# Altium PCB batteryreversed.PcbDoc
Units mil, origin at the board's own origin, x right, y up, seen from the top; angles counter-clockwise.
Board outline 3775.2 x 3550 mil, 2 copper layers (Top Layer, Bottom Layer), stack 64.572 mil thick; 86 components, 62 nets, 378 pads, 68 vias.
Unrouted connection lines stored in the file: 59.
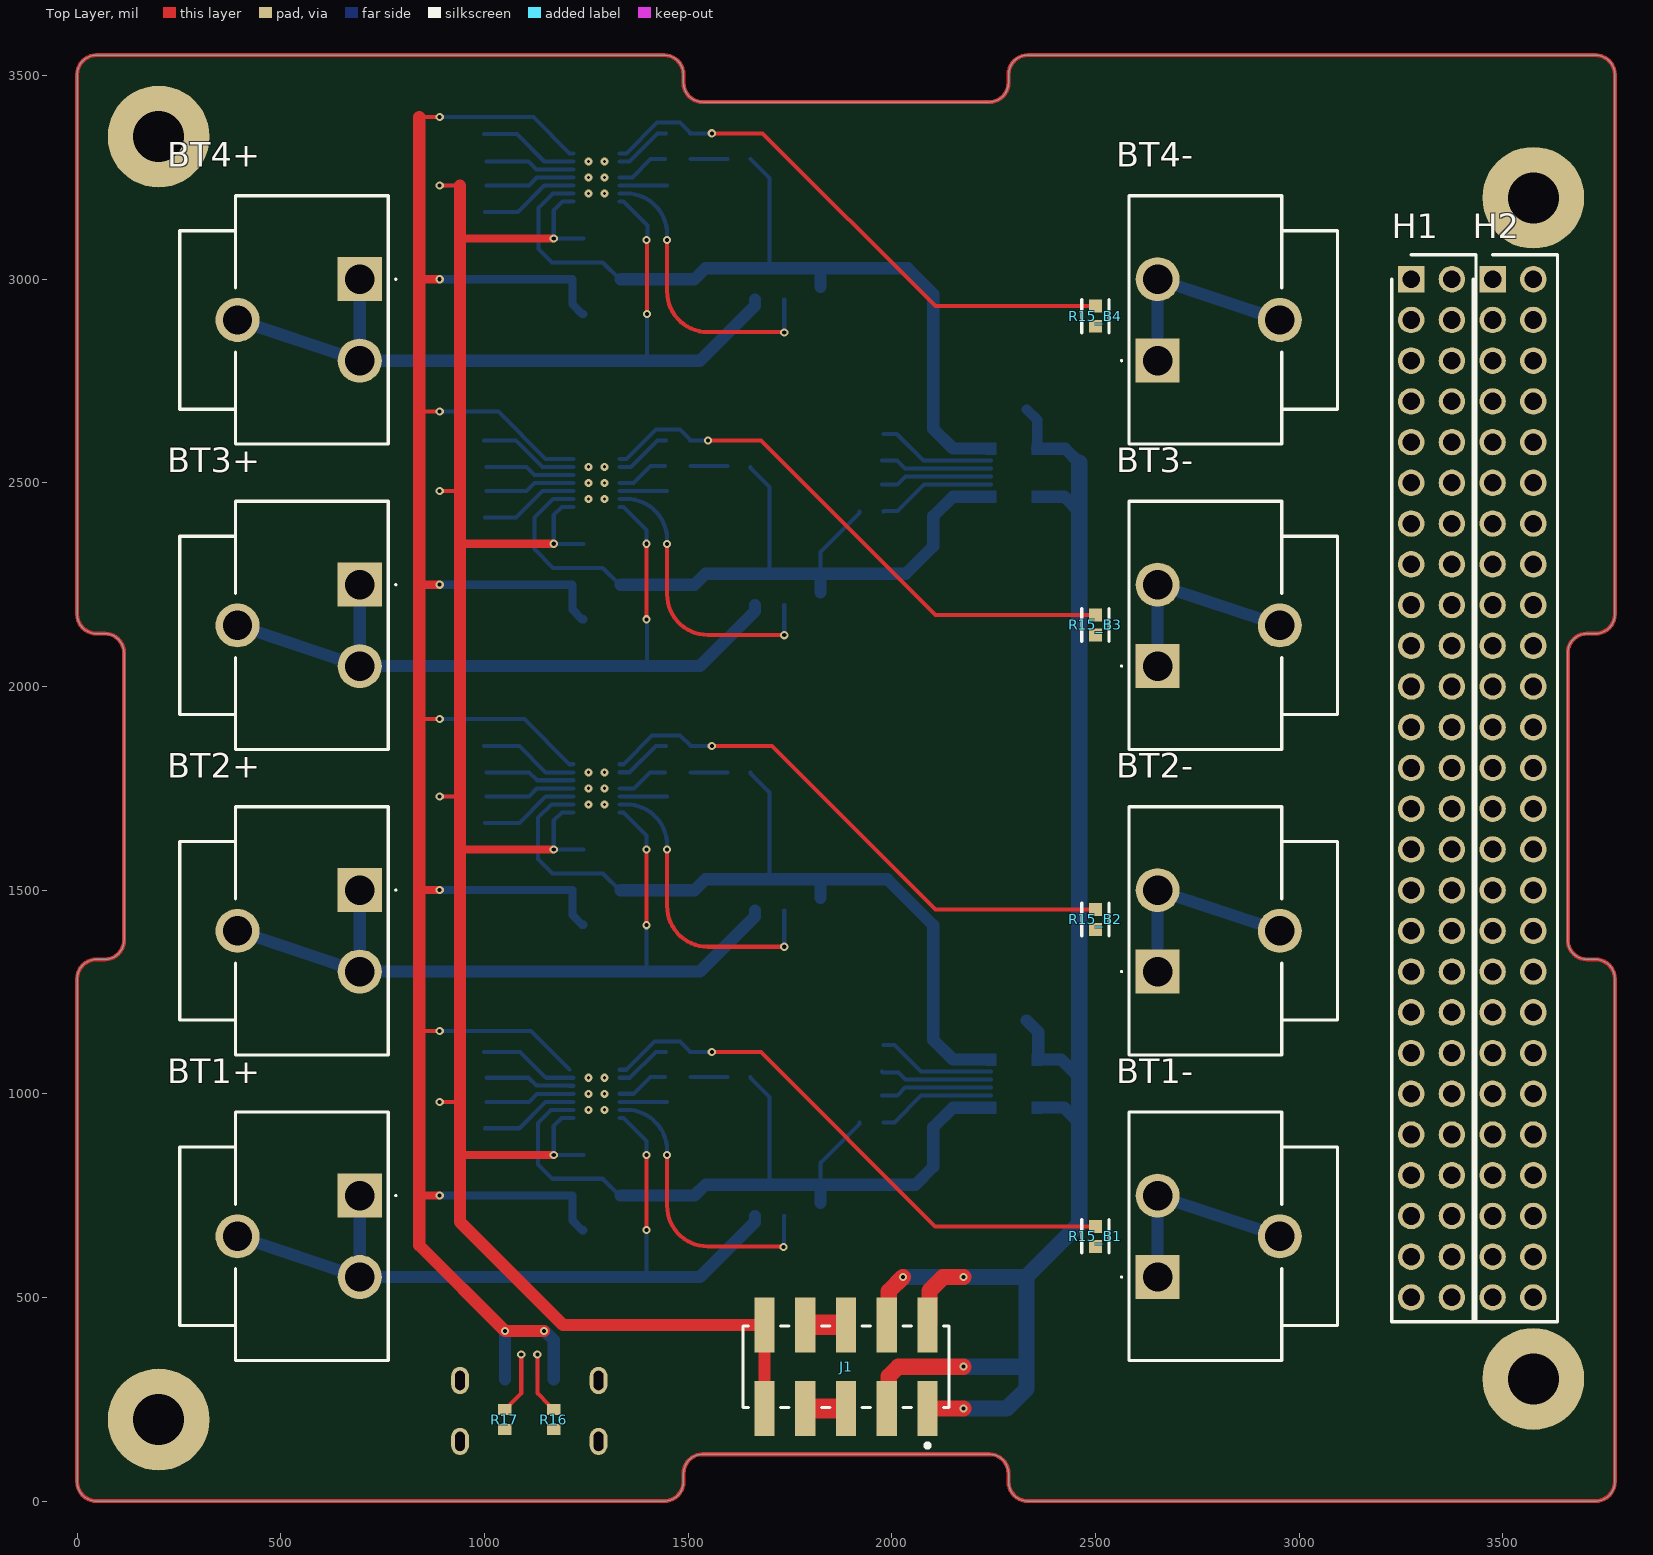
[diagram p0: Top Layer view]
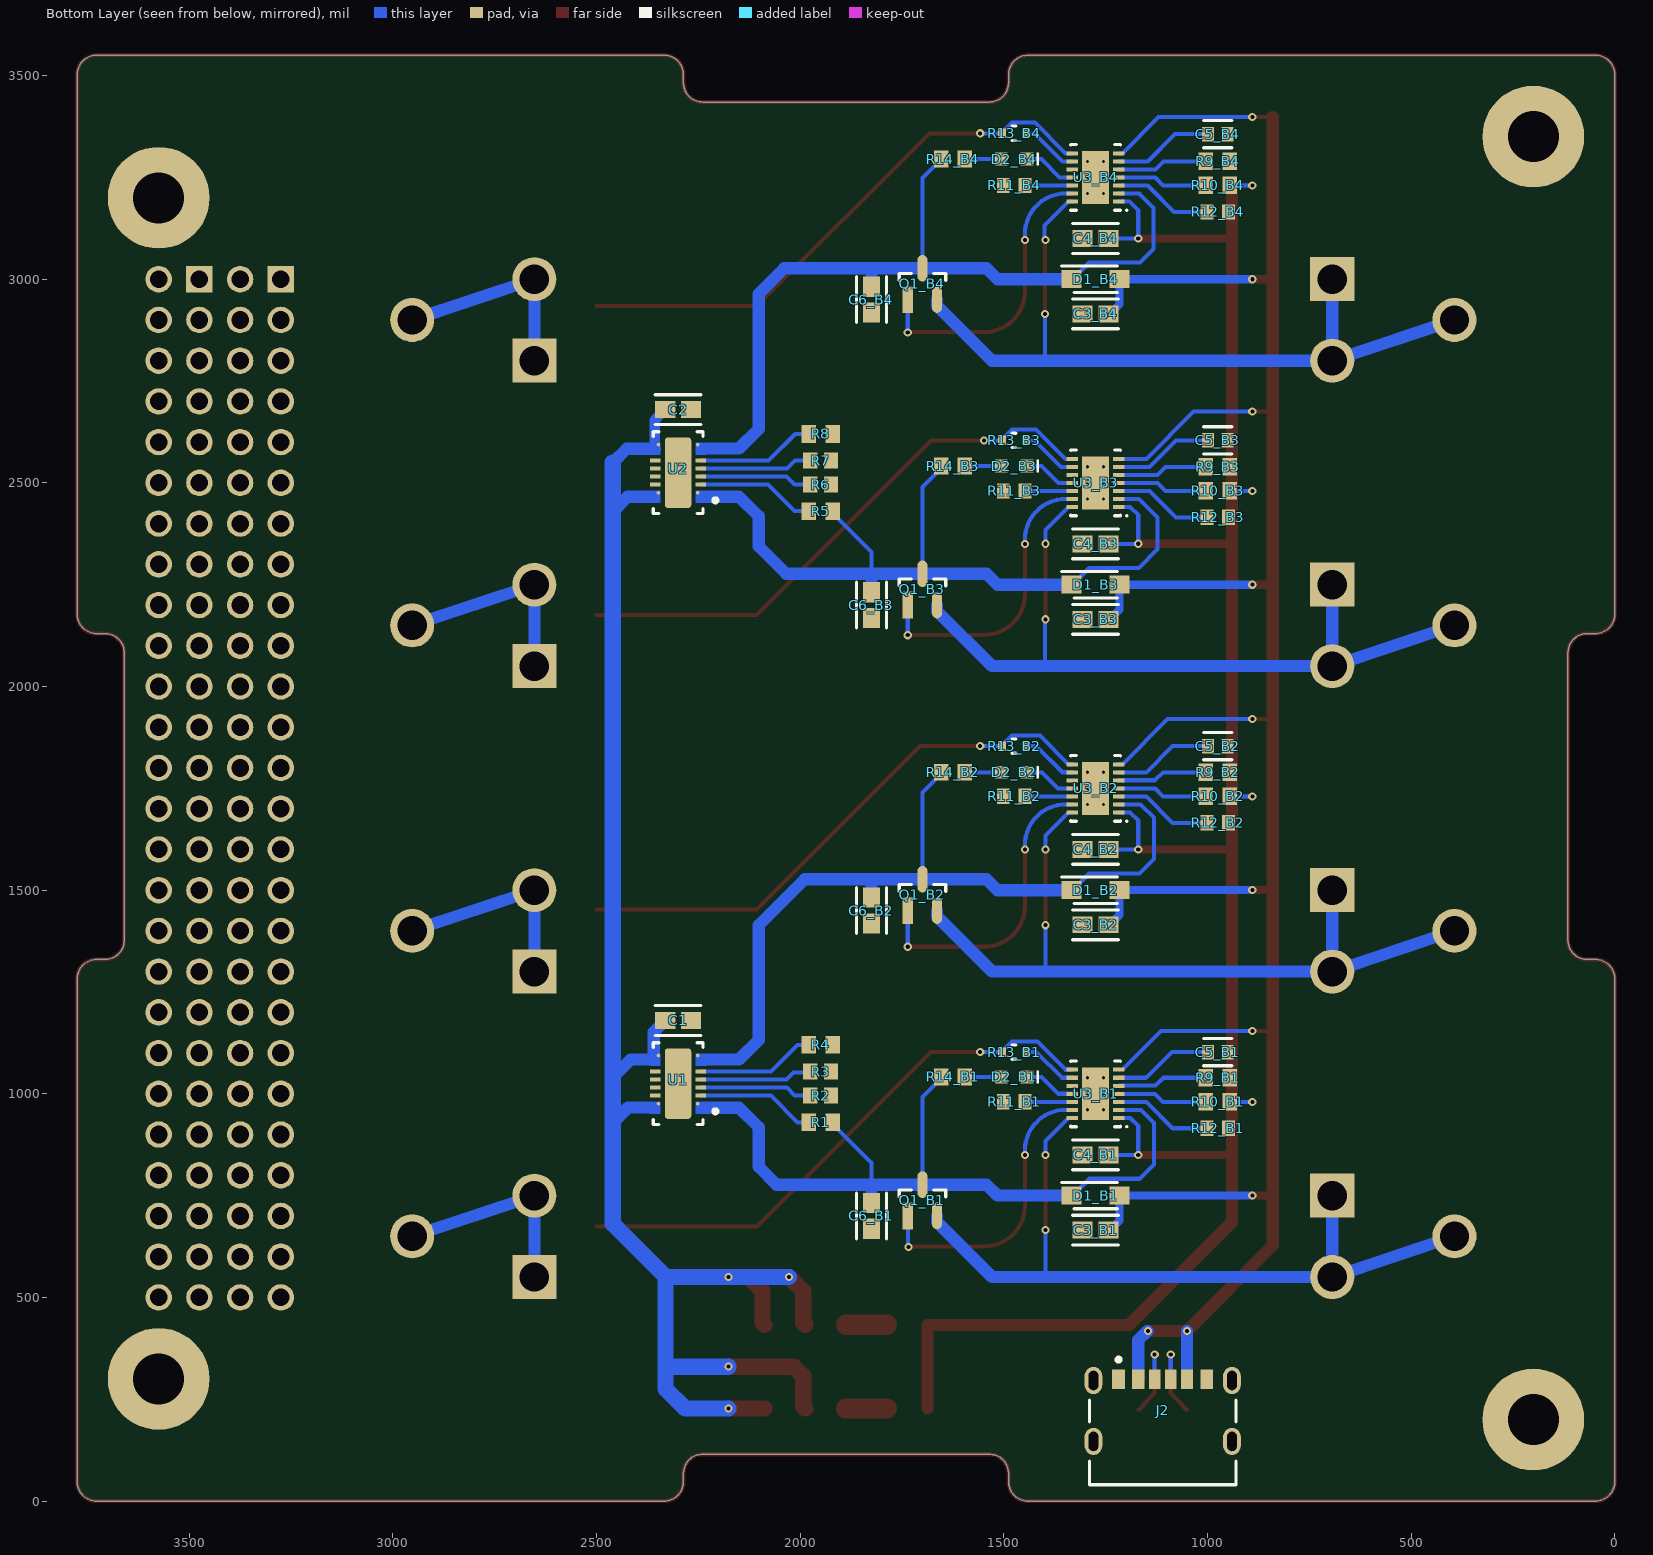
[diagram p1: Bottom Layer view, seen from below]
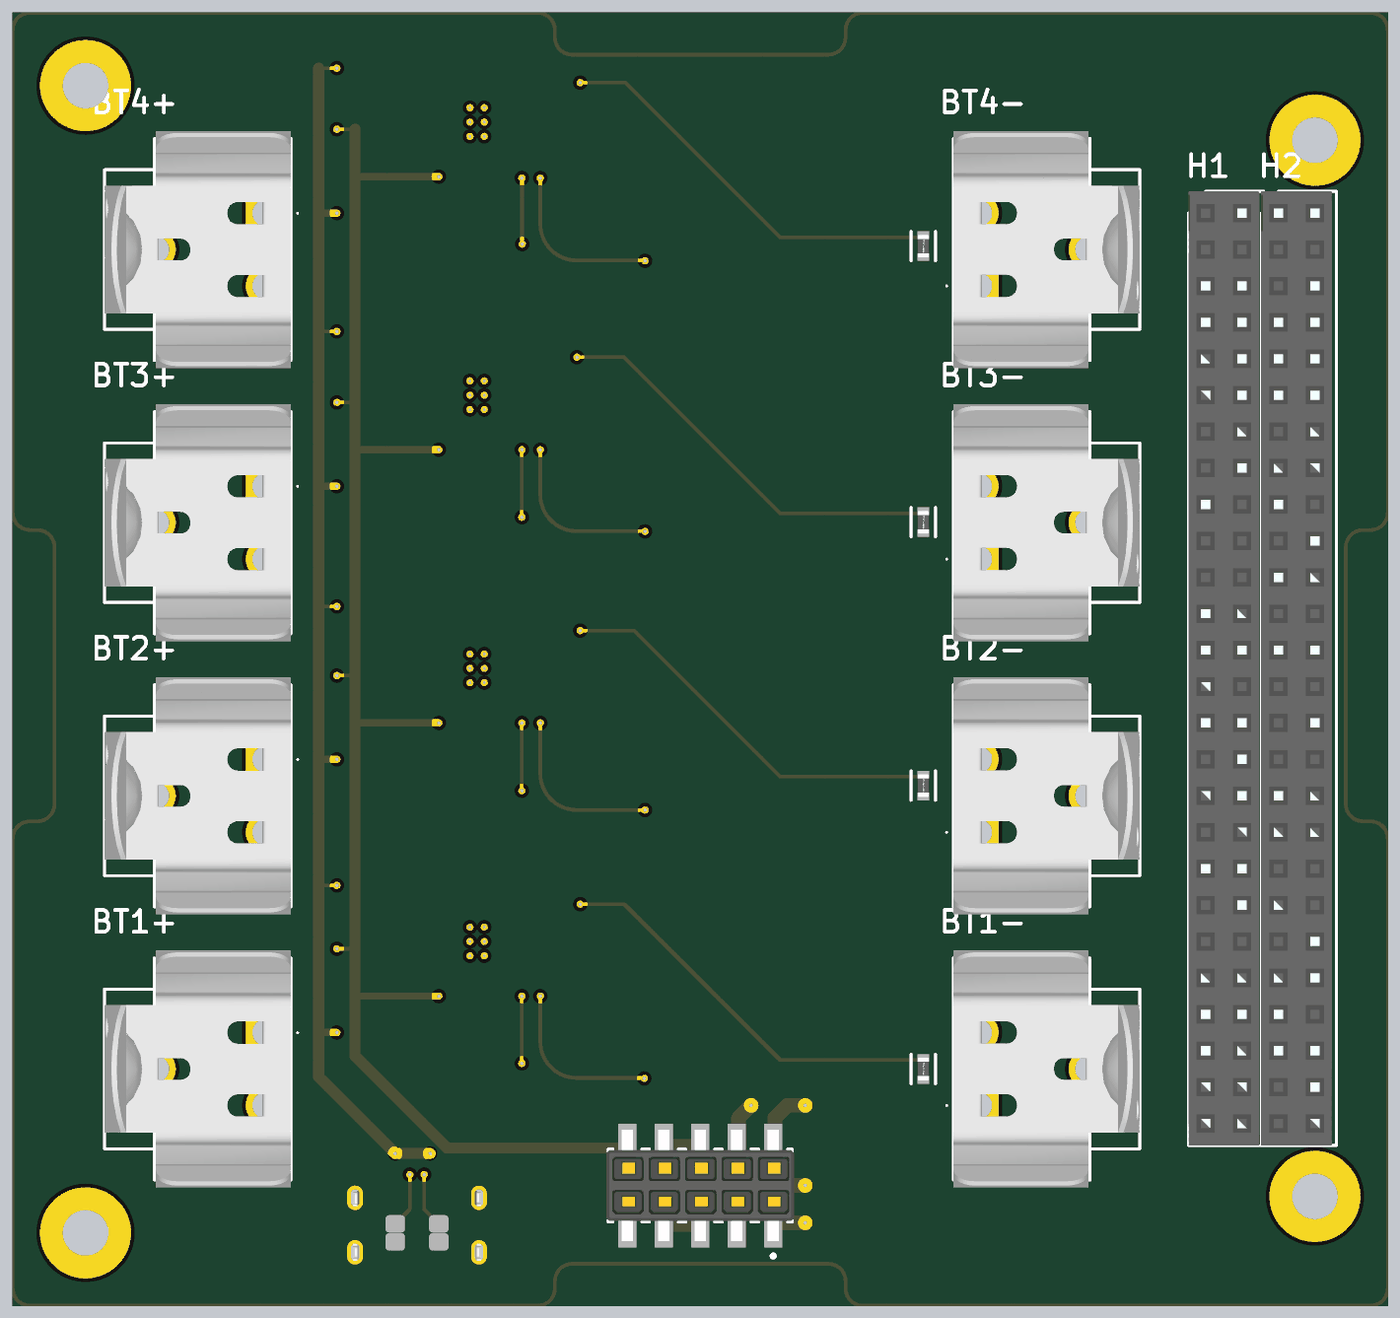
[diagram p2: 3D render of the assembled board from above, using the file's embedded part models]

## Layer stack, top to bottom
Top Solder: solder mask 0.39, Solder Resist, Dk 3.5
Top Layer: signal copper 2.7559
Dielectric1: core 59.06, FR-4, Dk 4.2
Bottom Layer: signal copper 2.7559
Bottom Solder: solder mask 0.39, Solder Resist, Dk 3.5

## Board outline
0,47.24 0,1282.68 cw(c47.24,1282.68) 47.24,1329.92 67.72,1329.92 ccw(c67.72,1377.17) 114.96,1377.17 114.96,2082.68 ccw(c67.72,2082.68) 67.72,2129.92 47.24,2129.92 cw(c47.24,2177.17) 0,2177.17 0,3502.76 cw(c47.24,3502.76) 47.24,3550 1441.34,3550 cw(c1441.34,3502.76) 1488.58,3502.76 1488.58,3482.28 ccw(c1535.83,3482.28) 1535.83,3435.04 2239.37,3435.04 ccw(c2239.37,3482.28) 2286.61,3482.28 2286.61,3502.76 cw(c2333.86,3502.76) 2333.86,3550 3727.95,3550 cw(c3727.95,3502.76) 3775.2,3502.76 3775.2,2177.17 cw(c3727.95,2177.17) 3727.95,2129.92 3707.09,2129.92 ccw(c3707.09,2082.68) 3659.84,2082.68 3659.84,1377.17 ccw(c3707.09,1377.17) 3707.09,1329.92 3727.95,1329.92 cw(c3727.95,1282.68) 3775.2,1282.68 3775.2,47.24 cw(c3727.95,47.24) 3727.95,0 2333.86,0 cw(c2333.86,47.24) 2286.61,47.24 2286.61,67.72 ccw(c2239.37,67.72) 2239.37,114.96 1535.83,114.96 ccw(c1535.83,67.72) 1488.58,67.72 1488.58,47.24 cw(c1441.34,47.24) 1441.34,0 47.24,0 cw(c47.24,47.24)

## Design rules (kind name [scope] priority, off if disabled: settings)
Clearance [All] p1: gap=9.5 ignorepadtopadclearanceinfootprint=FALSE
DiffPairsRouting [All] p1: maxlimit=10 minlimit=10 mostfreqgap=10 toplayer_minwidth=10 toplayer_maxwidth=10 toplayer_prefwidth=10 bottomlayer_minwidth=10 bottomlayer_maxwidth=10 bottomlayer_prefwidth=10 maxuncoupledlength=500
HoleSize [All] p1: absolutevalues=TRUE maxlimit=300 minlimit=10 maxpercent=80.000 minpercent=20.000
MinimumAnnularRing [All] p1: minimumring=10
PasteMaskExpansion [All] p1: expansion=10
PlaneClearance [All] p1: clearance=15
PlaneConnect [All] p1: pad.planeconnectstyle=Relief pad.reliefexpansion=20 pad.reliefentries=4 pad.reliefconductorwidth=10 pad.reliefairgap=10 via.planeconnectstyle=Direct via.reliefexpansion=20 via.reliefentries=4 via.reliefconductorwidth=10 via.reliefairgap=10
PolygonConnect [All] p1: thpad.connectstyle=Relief thpad.reliefconductorwidth=10 thpad.reliefentries=4 thpad.polygonreliefangle="90 Angle" thpad.airgapwidth=10 smdpad.connectstyle=Relief smdpad.reliefconductorwidth=10 smdpad.reliefentries=4 smdpad.polygonreliefangle="90 Angle" smdpad.airgapwidth=10 via.connectstyle=Direct via.reliefconductorwidth=10 via.reliefentries=4 via.polygonreliefangle="90 Angle" via.airgapwidth=10
RoutingVias [All] p1: holewidth=10 width=20 viastyle="Through Hole" minholewidth=10 minwidth=20 maxholewidth=10 maxwidth=20
SMDNeckDown [All] p1: percent=100.000
SilkToSolderMaskClearance SilkscreenOverComponentPads [IsPad] p1: minsilkscreentomaskgap=10 clearancetoexposedcopper=TRUE
SolderMaskExpansion [All] p1: expansion=10 istentingtop=FALSE
SupplyNets "Schematic Supply Nets" [InNet('GND')] p1: voltage=0.000
Width [All] p1: maxlimit=70 minlimit=5 preferedwidth=10
24 further rules are at their usual default settings.

## Classes and differential pairs
component class B4: C3_B4 C4_B4 C5_B4 C6_B4 D1_B4 D2_B4 Q1_B4 R9_B4 R10_B4 R11_B4 R12_B4 R13_B4 R14_B4 R15_B4 U3_B4
component class B3: C3_B3 C4_B3 C5_B3 C6_B3 D1_B3 D2_B3 Q1_B3 R9_B3 R10_B3 R11_B3 R12_B3 R13_B3 R14_B3 R15_B3 U3_B3
component class B2: C3_B2 C4_B2 C5_B2 C6_B2 D1_B2 D2_B2 Q1_B2 R9_B2 R10_B2 R11_B2 R12_B2 R13_B2 R14_B2 R15_B2 U3_B2
component class B1: C3_B1 C4_B1 C5_B1 C6_B1 D1_B1 D2_B1 Q1_B1 R9_B1 R10_B1 R11_B1 R12_B1 R13_B1 R14_B1 R15_B1 U3_B1
channel class BatteryCharger: B1 B2 B3 B4
net class BAT: BAT1 BAT2 BAT3 BAT4
net class BAT_PWR: Vout_BC1 Vout_BC2 Vout_BC3 Vout_BC4
component class U_BMS: C1 C2 R1 R2 R3 R4 R5 R6 R7 R8 U1 U2
component class Top: BT1+ BT1- BT2+ BT2- BT3+ BT3- BT4+ BT4- H1 H2 J1 J2 R16 R17

## Components (designator, comment, footprint, x,y, rotation, side; value= is the part's Value field where it differs from the comment)
BT1+ "54" 54 693.7,750 r180 top locked
BT1- "54" 54 2652.76,550 r0 top locked
BT2+ "54" 54 693.7,1500 r180 top locked
BT2- "54" 54 2652.76,1300 r0 top locked
BT3+ "54" 54 693.7,2250 r180 top locked
BT3- "54" 54 2652.76,2050 r0 top locked
BT4+ "54" 54 693.7,3000 r180 top locked
BT4- "54" 54 2652.76,2800 r0 top locked
C1 "4.7uF" FP-GRM188-0_15-IPC_A 2300,1180 r0 bottom locked
C2 "4.7uF" FP-GRM188-0_15-IPC_A 2300,2680 r0 bottom locked
C3_B1 "4.7uF" FP-GRM188-0_15-IPC_A 1275,665 r0 bottom locked (schematic designator C3)
C3_B2 "4.7uF" FP-GRM188-0_15-IPC_A 1275,1415 r0 bottom locked (schematic designator C3)
C3_B3 "4.7uF" FP-GRM188-0_15-IPC_A 1275,2165 r0 bottom locked (schematic designator C3)
C3_B4 "4.7uF" FP-GRM188-0_15-IPC_A 1275,2915 r0 bottom locked (schematic designator C3)
C4_B1 "4.7uF" FP-GRM188-0_15-IPC_A 1275,850 r0 bottom locked (schematic designator C4)
C4_B2 "4.7uF" FP-GRM188-0_15-IPC_A 1275,1600 r0 bottom locked (schematic designator C4)
C4_B3 "4.7uF" FP-GRM188-0_15-IPC_A 1275,2350 r0 bottom locked (schematic designator C4)
C4_B4 "4.7uF" FP-GRM188-0_15-IPC_A 1275,3100 r0 bottom locked (schematic designator C4)
C5_B1 "0.1uF" FP-C0603C-CF-MFG 975,1102.36 r180 bottom locked value="0.10 μF" (schematic designator C5)
C5_B2 "0.1uF" FP-C0603C-CF-MFG 975,1853.68 r180 bottom locked value="0.10 μF" (schematic designator C5)
C5_B3 "0.1uF" FP-C0603C-CF-MFG 975,2604.33 r180 bottom locked value="0.10 μF" (schematic designator C5)
C5_B4 "0.1uF" FP-C0603C-CF-MFG 975,3356.3 r180 bottom locked value="0.10 μF" (schematic designator C5)
C6_B1 "4.7uF" FP-GRM188-0_15-IPC_A 1825,700 r270 bottom locked (schematic designator C6)
C6_B2 "4.7uF" FP-GRM188-0_15-IPC_A 1825,1450 r270 bottom locked (schematic designator C6)
C6_B3 "4.7uF" FP-GRM188-0_15-IPC_A 1825,2200 r270 bottom locked (schematic designator C6)
C6_B4 "4.7uF" FP-GRM188-0_15-IPC_A 1825,2950 r270 bottom locked (schematic designator C6)
D1_B1 "NRVB120VLSFT1G" SODFL3616X98N 1275,750 r180 bottom locked (schematic designator D1)
D1_B2 "NRVB120VLSFT1G" SODFL3616X98N 1275,1500 r180 bottom locked (schematic designator D1)
D1_B3 "NRVB120VLSFT1G" SODFL3616X98N 1275,2250 r180 bottom locked (schematic designator D1)
D1_B4 "NRVB120VLSFT1G" SODFL3616X98N 1275,3000 r180 bottom locked (schematic designator D1)
D2_B1 "" WL-SMCW_0603_150060xx75000 1475,1041.34 r0 bottom locked (schematic designator D2)
D2_B2 "" WL-SMCW_0603_150060xx75000 1475,1789.37 r0 bottom locked (schematic designator D2)
D2_B3 "" WL-SMCW_0603_150060xx75000 1475,2541.34 r0 bottom locked (schematic designator D2)
D2_B4 "" WL-SMCW_0603_150060xx75000 1475,3294.92 r0 bottom locked (schematic designator D2)
H1 "ESQ-126-39-G-D-001" RHDR52W64P254_2X26_6654X495X1135P 3275.2,3000 r270 top locked
H2 "ESQ-126-39-G-D-001" RHDR52W64P254_2X26_6654X495X1135P 3475.2,3000 r270 top locked
J1 "IPS1-105-01-L-D-VS" FP-IPS1-105-01-L-D-VS-MFG 1887.6,330 r0 top locked
J2 "217175-0001" FP-217175-0001-MFG 1110,180 r180 bottom locked
Q1_B1 "DMP2035U-7" FP-SOT23-IPC_A 1700,738.45 r90 bottom locked (schematic designator Q1)
Q1_B2 "DMP2035U-7" FP-SOT23-IPC_A 1700,1488.45 r90 bottom locked (schematic designator Q1)
Q1_B3 "DMP2035U-7" FP-SOT23-IPC_A 1700,2238.45 r90 bottom locked (schematic designator Q1)
Q1_B4 "DMP2035U-7" FP-SOT23-IPC_A 1700,2988.45 r90 bottom locked (schematic designator Q1)
R1 "100K" RESC1608X55X30ML20T10 1950,930 r180 bottom locked
R2 "124" RESC1608X55X30NL20T20 1950,995.47 r0 bottom locked
R3 "124" RESC1608X55X30NL20T20 1950,1054.53 r0 bottom locked
R4 "100K" RESC1608X55X30ML20T10 1950,1120 r180 bottom locked
R5 "100K" RESC1608X55X30ML20T10 1950,2430 r180 bottom locked
R6 "124" RESC1608X55X30NL20T20 1950,2495.47 r0 bottom locked
R7 "124" RESC1608X55X30NL20T20 1950,2554.53 r0 bottom locked
R8 "100K" RESC1608X55X30ML20T10 1950,2620 r180 bottom locked
R9_B1 "100K" RESC1608X55X30ML20T10 975,1039.37 r180 bottom locked (schematic designator R9)
R9_B2 "100K" RESC1608X55X30ML20T10 975,1789.37 r180 bottom locked (schematic designator R9)
R9_B3 "100K" RESC1608X55X30ML20T10 975,2539.37 r180 bottom locked (schematic designator R9)
R9_B4 "100K" RESC1608X55X30ML20T10 975,3289.37 r180 bottom locked (schematic designator R9)
R10_B1 "100K" RESC1608X55X30ML20T10 975,980.31 r180 bottom locked (schematic designator R10)
R10_B2 "100K" RESC1608X55X30ML20T10 975,1730.31 r180 bottom locked (schematic designator R10)
R10_B3 "100K" RESC1608X55X30ML20T10 975,2480.31 r180 bottom locked (schematic designator R10)
R10_B4 "100K" RESC1608X55X30ML20T10 975,3230.31 r180 bottom locked (schematic designator R10)
R11_B1 "71.5K" RESC1608X55X30NL15T15 1475,980.31 r180 bottom locked (schematic designator R11)
R11_B2 "71.5K" RESC1608X55X30NL15T15 1475,1730.31 r180 bottom locked (schematic designator R11)
R11_B3 "71.5K" RESC1608X55X30NL15T15 1475,2480.31 r180 bottom locked (schematic designator R11)
R11_B4 "71.5K" RESC1608X55X30NL15T15 1475,3230.31 r180 bottom locked (schematic designator R11)
R12_B1 "2.1K" RESC1608X55X30NL15T15 975,915.35 r0 bottom locked (schematic designator R12)
R12_B2 "2.1K" RESC1608X55X30NL15T15 975,1665.35 r0 bottom locked (schematic designator R12)
R12_B3 "2.1K" RESC1608X55X30NL15T15 975,2415.35 r0 bottom locked (schematic designator R12)
R12_B4 "2.1K" RESC1608X55X30NL15T15 975,3165.35 r0 bottom locked (schematic designator R12)
R13_B1 "10K" FP-RK73B1J-MFG 1475,1102.36 r180 bottom locked (schematic designator R13)
R13_B2 "10K" FP-RK73B1J-MFG 1475,1853.68 r180 bottom locked (schematic designator R13)
R13_B3 "10K" FP-RK73B1J-MFG 1475,2604.33 r180 bottom locked (schematic designator R13)
R13_B4 "10K" FP-RK73B1J-MFG 1475,3358.27 r180 bottom locked (schematic designator R13)
R14_B1 "510 ohm" RESC1608X55X30ML15T15 1625,1041.34 r0 bottom locked (schematic designator R14)
R14_B2 "510 ohm" RESC1608X55X30ML15T15 1625,1789.37 r0 bottom locked (schematic designator R14)
R14_B3 "510 ohm" RESC1608X55X30ML15T15 1625,2541.34 r0 bottom locked (schematic designator R14)
R14_B4 "510 ohm" RESC1608X55X30ML15T15 1625,3294.92 r0 bottom locked (schematic designator R14)
R15_B1 "ERT-J1VG103JA" FP-ERTJ1-IPC_C 2500,650 r270 top locked (schematic designator R15)
R15_B2 "ERT-J1VG103JA" FP-ERTJ1-IPC_C 2500,1428 r270 top locked (schematic designator R15)
R15_B3 "ERT-J1VG103JA" FP-ERTJ1-IPC_C 2500,2151.35 r270 top locked (schematic designator R15)
R15_B4 "ERT-J1VG103JA" FP-ERTJ1-IPC_C 2500,2909.25 r270 top locked (schematic designator R15)
R16 "5.1K" RESC1608X55X30LL15T15 1169.84,200 r270 top locked
R17 "5.1K" RESC1608X55X30LL15T15 1050.16,200 r270 top locked
U1 "LTC4415IDHC#TRPBF" FP-DHC-16-05-08-1872-MFG 2300,1025 r0 bottom locked
U2 "LTC4415IDHC#TRPBF" FP-DHC-16-05-08-1872-MFG 2300,2525 r0 bottom locked
U3_B1 "LTC4085EDE-4#PBF" LT-DE-14_V 1275,1000 r0 bottom locked (schematic designator U3)
U3_B2 "LTC4085EDE-4#PBF" LT-DE-14_V 1275,1750 r0 bottom locked (schematic designator U3)
U3_B3 "LTC4085EDE-4#PBF" LT-DE-14_V 1275,2500 r0 bottom locked (schematic designator U3)
U3_B4 "LTC4085EDE-4#PBF" LT-DE-14_V 1275,3250 r0 bottom locked (schematic designator U3)

## Footprints (in the part's own frame and the unit in brackets; to place one, negate y for a bottom-side part, rotate by r counter-clockwise, add the part's x,y. Pads: shape width x height; smd on the part's side, far side on the other; paste and mask are expansions set on the pad)
54 [mm]
  rect 2.745x2.745 hole 1.83: 1(0,0)
  round 2.745 hole 1.83: 2(0,5.08) 3(7.62,2.54)
  silkscreen extent -2.3,-5.21 11.22,10.29, body extent -1.77,-5.77 11.22,10.85, height 16.66
FP-217175-0001-MFG [mm]
  rrect100% 1.1x1.7 hole 1.2 slot 0.6 at 0 deg paste-2539.97 mask+0: 1(-4.32,2.95) 2(4.32,2.95) 3(-4.32,-0.85) 4(4.32,-0.85)
  rect 0.7x1.2 smd paste+0 mask+0: A5(-0.5,3.03) B5(0.5,3.03)
  rect 0.76x1.2 smd paste+0 mask+0: A9(1.52,3.03) B9(-1.52,3.03)
  rect 0.8x1.2 smd paste+0 mask+0: A12(2.75,3.03) B12(-2.75,3.03)
  silkscreen extent -4.57,-3.55 4.57,4.37, body extent -4.47,-3.45 4.47,3.45, height 3.46
FP-C0603C-CF-MFG [mm]
  rect 0.75x0.9 smd paste+0 mask+0: 1(-0.6,0) 2(0.6,0)
  silkscreen extent -0.87,-0.85 0.88,0.85, body extent -0.8,-0.4 0.8,0.4, height 0.87
FP-DHC-16-05-08-1872-MFG [mm]
  round 0.219 smd paste+0 mask+0: 1-2(-1.222,1.247) 7-8(-1.222,-1.753) 9-10(1.222,-1.753) 15-16(1.222,1.247)
  rect 0.65x0.25 smd paste+0 mask+0: 3(-1.425,0.75) 4(-1.425,0.25) 5(-1.425,-0.25) 6(-1.425,-0.75) 11(1.425,-0.75) 12(1.425,-0.25) 13(1.425,0.25) 14(1.425,0.75)
  rrect24% 1.65x4.4 smd paste+0 mask+0: 17(0,0)
  Top Layer region: 1.75,1.875 1.1,1.875 1.1,1.125 1.75,1.125 1.75,1.375 1.29,1.375 1.29,1.625 1.75,1.625 1.75,1.875
  Top Layer region: 1.75,-1.875 1.1,-1.875 1.1,-1.125 1.75,-1.125 1.75,-1.375 1.29,-1.375 1.29,-1.625 1.75,-1.625 1.75,-1.875
  Top Layer region: -1.75,-1.875 -1.1,-1.875 -1.1,-1.125 -1.75,-1.125 -1.75,-1.375 -1.29,-1.375 -1.29,-1.625 -1.75,-1.625 -1.75,-1.875
  Top Layer region: -1.75,1.875 -1.1,1.875 -1.1,1.125 -1.75,1.125 -1.75,1.375 -1.29,1.375 -1.29,1.625 -1.75,1.625 -1.75,1.875
  silkscreen extent -2.45,-2.55 1.55,2.55, body extent -1.51,-2.5 1.51,2.5, height 0.85
FP-ERTJ1-IPC_C [mil]
  rect 31.73x31.97 smd paste+0 mask+0: 1(-24.65,0) 2(24.65,0)
  silkscreen extent -41,-33 41,33, body extent -44,-22 44,22, height 10
FP-GRM188-0_15-IPC_A [mil]
  rect 49.46x41.66 smd paste+0 mask+0: 1(-31.53,0) 2(31.53,0)
  silkscreen extent -56,-37 56,37
FP-IPS1-105-01-L-D-VS-MFG [mm]
  rect 1.27x3.43 smd paste+0 mask+0: 1(5.08,-2.605) 2(5.08,2.605) 3(2.54,-2.605) 4(2.54,2.605) 5(0,-2.605) 6(0,2.605) 7(-2.54,-2.605) 8(-2.54,2.605) 9(-5.08,-2.605) 10(-5.08,2.605)
  silkscreen extent -6.42,-5.04 6.42,2.54, body extent -6.52,-4.42 6.52,4.42, height 0.25
FP-RK73B1J-MFG [mm]
  rect 0.5x0.6 smd paste+0 mask+0: 1(-0.75,0) 2(0.75,0)
  silkscreen extent -0.13,-0.45 0.13,0.45, body extent -0.8,-0.4 0.8,0.4, height 0.55
FP-SOT23-IPC_A [mm]
  rect 1.659x0.627 smd paste+0 mask+0: 1(-0.977,0.915)
  rrect100% 1.659x0.627 smd paste+0 mask+0: 2(-0.977,-0.915) 3(0.977,0)
  silkscreen extent 0.23,-1.45 0.65,1.45, body extent -1.2,-1.45 1.2,1.45, height 1.1
LT-DE-14_V [mm] "SON, 14-Leads, Body 4x3mm, Pitch 0.5mm, Thermal Pad 3.3x1.7mm"
  rect 0.7x0.25 smd: 1(-1.45,1.5) 2(-1.45,1) 3(-1.45,0.5) 4(-1.45,0) 5(-1.45,-0.5) 6(-1.45,-1) 7(-1.45,-1.5) 8(1.45,-1.5) 9(1.45,-1) 10(1.45,-0.5) 11(1.45,0) 12(1.45,0.5) 13(1.45,1) 14(1.45,1.5)
  rect 1.7x3.3 smd: 15(0,0)
  silkscreen extent -2,-2.05 1.55,2.1, body extent -1.5,-2 1.5,2, height 0.8
RESC1608X55X30LL15T15 [mm] "Chip Resistor, 2-Leads, Body 1.60x0.80mm, IPC High Density"
  rect 0.7x0.85 smd: 1(-0.625,0) 2(0.625,0)
  body extent -0.87,-0.48 0.87,0.48, height 0.55
RESC1608X55X30ML15T15 [mm] "Chip Resistor, 2-Leads, Body 1.60x0.80mm, IPC Low Density"
  rect 0.9x1.05 smd: 1(-0.725,0) 2(0.725,0)
  body extent -0.87,-0.48 0.87,0.48, height 0.55
RESC1608X55X30ML20T10 [mm] "Chip Resistor, 2-Leads, Body 1.60x0.80mm, IPC Low Density"
  rect 0.9x1.1 smd: 1(-0.75,0) 2(0.75,0)
  body extent -0.9,-0.5 0.9,0.5, height 0.55
RESC1608X55X30NL15T15 [mm] "Chip Resistor, 2-Leads, Body 1.60x0.80mm, IPC Medium Density"
  rect 0.8x0.95 smd: 1(-0.675,0) 2(0.675,0)
  body extent -0.87,-0.48 0.87,0.48, height 0.55
RESC1608X55X30NL20T20 [mm] "Chip Resistor, 2-Leads, Body 1.60x0.80mm, IPC Medium Density"
  rect 0.9x1 smd: 1(-0.65,0) 2(0.65,0)
  body extent -0.9,-0.5 0.9,0.5, height 0.55
RHDR52W64P254_2X26_6654X495X1135P [mm]
  rect 1.65x1.65 hole 1.1: 1(0,0)
  round 1.65 hole 1.1: 2(0,2.54) 3(2.54,0) 4(2.54,2.54) 5(5.08,0) 6(5.08,2.54) 7(7.62,0) 8(7.62,2.54) 9(10.16,0) 10(10.16,2.54) 11(12.7,0) 12(12.7,2.54) 13(15.24,0) 14(15.24,2.54) 15(17.78,0) 16(17.78,2.54) 17(20.32,0) 18(20.32,2.54) 19(22.86,0) 20(22.86,2.54) 21(25.4,0) 22(25.4,2.54) 23(27.94,0) 24(27.94,2.54) 25(30.48,0) 26(30.48,2.54) 27(33.02,0) 28(33.02,2.54) 29(35.56,0) 30(35.56,2.54) 31(38.1,0) 32(38.1,2.54) 33(40.64,0) 34(40.64,2.54) 35(43.18,0) 36(43.18,2.54) 37(45.72,0) 38(45.72,2.54) 39(48.26,0) 40(48.26,2.54) 41(50.8,0) 42(50.8,2.54) 43(53.34,0) 44(53.34,2.54) 45(55.88,0) 46(55.88,2.54) 47(58.42,0) 48(58.42,2.54) 49(60.96,0) 50(60.96,2.54) 51(63.5,0) 52(63.5,2.54)
  silkscreen extent -1.52,-1.2 65.02,4.05, body extent -1.52,-1.2 65.02,3.74, height 11.35
SODFL3616X98N [mm]
  rect 1.24x1.12 smd: 1(-1.5,0) 2(1.5,0)
  silkscreen extent -2.12,-0.82 1.35,0.82, body extent -1.8,-0.82 1.8,0.82, height 0.98
WL-SMCW_0603_150060xx75000 [mm] "SMD Mono-color Chip LED, body 1.60 x 0.80 mm"
  rect 0.8x0.8 smd: 1(-0.8,0) 2(0.8,0)
  silkscreen extent -1.55,-0.4 -1.4,0.4, body extent -0.8,-0.4 0.8,0.4, height 0.7

## Part data
BT1+ BT1- BT2+ BT2- BT3+ BT3- BT4+ BT4-: library part CMP-00029-00001-1, "Battery", Manufacturer_Name="Keystone Electronics", Mouser Part Number=534-54, Arrow Part Number=54, Arrow Price/Stock=https://www.arrow.com/en/products/54/keystone-electronics?utm_currency=USD&region=europe, Datasheet Link=http://www.keyelco.com/product-pdf.cfm?p=826, Design Item ID=54, Height=16.97mm, Manufacturer_Part_Number=54, Mouser Price/Stock=https://www.mouser.co.uk/ProductDetail/Keystone-Electronics/54?qs=73q%2FgRcW4F3NakoJDesViw%3D%3D, Source=SamacSys.SchLib
C1 C2 C3_B1 C3_B2 C3_B3 C3_B4 C4_B1 C4_B2 C4_B3 C4_B4 C6_B1 C6_B2 C6_B3 C6_B4: library part CMP-06035-000034-2, "CAP CER 4.7UF 10V X7S 0603", Case Code (Imperial)=0603, Case Code (Metric)=1608, Dielectric=X7S, Max Operating Temperature=125°C, Min Operating Temperature=-55°C, Package Quantity=4000, Resistor Type=Ceramic, Tolerance=10%, Voltage Rating=10V, Capacitance=4.7uF, Case/Package=0603, Height=0.8mm, Length=1.6mm, Material=Ceramic, Mount="Surface Mount", Packaging="Tape and Reel", Termination=SMD/SMT, Thickness=0.037inch, Voltage Rating (DC)=10V, Weight=0.000222oz, Width=0.8mm
C5_B1 C5_B2 C5_B3 C5_B4: library part CMP-2006-03061-2, "CAP CER 0.1UF 50V X7R 0603", Capacitance="0.10 μF", Manufacturer=KEMET, Manufacturer Part Number=C0603C104K5RACTU, Package=C0603C-CF, Temperature="-55°C to +125°C", Temperature Characteristic=X7R, Temperature Coefficient=30ppm/°C, Temperature Range High=+125°C, Temperature Range Low=-55°C, Tolerance=0.1, Voltage Rating="50 V", Automotive=Yes, Automotive Grade="Grade 1", Category=Cap, ComponentLink2Description=Datasheet, ComponentLink2URL=https://api.kemet.com/component-edge/download/datasheet/C0603C100J5GACAUTO.pdf, Device Class L1="Passive Components", Device Class L2=Capacitors, Device Class L3="Ceramic Capacitors", Digikey Description="CAP CER 0.1UF 50V X7R 0603", Height=0.87mm, Lead Free=Yes, Material=Ceramic, Octopart=https://octopart.com/c0603c104k5ractu-kemet-139244, RoHS=TRUE
D1_B1 D1_B2 D1_B3 D1_B4: "Schottky Diode", Manufacturer_Name=onsemi, Mouser Part Number=863-NRVB120VLSFT1G, Arrow Part Number=NRVB120VLSFT1G, Arrow Price/Stock=null?utm_currency=USD&region=nac, Datasheet Link=https://www.onsemi.com/pub/Collateral/MBR120VLSFT1-D.PDF, Height=0.98mm, Manufacturer_Part_Number=NRVB120VLSFT1G, Mouser Price/Stock=https://www.mouser.co.uk/ProductDetail/onsemi/NRVB120VLSFT1G?qs=tCMd4XlZ%2FiDc2vkUzw3hig%3D%3D
D2_B1 D2_B2 D2_B3 D2_B4: library part CMP-1426-00001-4, "LED Low-Power Uni-Color Red 630nm 2V 2-Pin Chip 0603(1608Metric) T/R", Case Code (Imperial)=0603, Case Code (Metric)=1608, Color=Red, Forward Current=100mA, Forward Voltage=2V, Max Junction Temperature (Tj)=95°C, Max Operating Temperature=85°C, Max Reverse Voltage (DC)=5V, Min Operating Temperature=-40°C, Power Dissipation=72mW, Test Current=20mA, Case/Package=0603, Dominant Wavelength=625nm, Height=700µm, Length=1.6mm, Lens Style="Clear, Rectangular", Luminous Intensity=250mcd, Mount="Surface Mount", Packaging="Tape and Reel", Peak Wavelength=630nm, REACH SVHC=Unknown, Reverse Voltage=5V, RoHS=Compliant, Viewing Angle=140°, Wavelength=625nm, Width=800µm
H1 H2: library part CMP-002-00086-1, "PC / 104 Connectors Elevated Socket Strip", Manufacturer_Name=SAMTEC, Mouser Part Number=200-ESQ12639GD001, Arrow Part Number=ESQ-126-39-G-D-001, Arrow Price/Stock=https://www.arrow.com/en/products/esq-126-39-g-d-001/samtec?region=nac, Datasheet Link=http://suddendocs.samtec.com/catalog_english/esq_th.pdf, Design Item ID=ESQ-126-39-G-D-001, Height=11.35mm, Manufacturer_Part_Number=ESQ-126-39-G-D-001, Mouser Price/Stock=https://www.mouser.co.uk/ProductDetail/Samtec/ESQ-126-39-G-D-001?qs=PB6%2FjmICvI2K%2FCIgL4SVbg%3D%3D, Source=SamacSys.SchLib
J1: library part CMP-02766-000002-1, "CONN RCPT 10POS 0.1 GOLD SMD", Manufacturer=Samtec, Package=0, Temperature="-55°C to +125°C", Temperature Range High=+125°C, Temperature Range Low=-55°C, Voltage Rating=1095V, Automotive=No, Category=Conn, ComponentLink2Description=Datasheet, ComponentLink2URL=http://suddendocs.samtec.com/prints/ips1-1xx-xx-xx-d-vs-xx-xx-mkt.pdf, Conn Gender=Female, Conn Orientation=Vertical, Contact Material=Gold,Nickel, Device Class L1=Connectors, Device Class L2="Headers and Wire Housings", Device Class L3=unset, Digikey Description="CONN RCPT 10POS 0.1 GOLD SMD", Footprint Url=http://suddendocs.samtec.com/prints/ips1-vs.pdf, Height=8.64mm, Is Female=yes, Lead Free=Yes, Manufacturer Part Number=IPS1-105-01-L-D-VS, Number of Contacts=10, Number of Rows=2, Octopart=https://octopart.com/ips1-105-01-l-d-vs-samtec-19544880, Pitch=2.54mm, RoHS=TRUE, Standoff Height=1.02mm
J2: library part CMP-04767-000026-1, "CONN RCP USB2.0 C 6+18P SMD RA"
Q1_B1 Q1_B2 Q1_B3 Q1_B4: library part CMP-2000-06174-3, "MOSFET P-CH 20V 3.6A SOT-23", Case/Package=SOT-23-3, Continuous Drain Current (ID)=3.6A, Drain To Source Breakdown Voltage=-20V, Drain To Source Resistance=23mR, Drain to Source Voltage (Vdss)=20V, Gate to Source Voltage (Vgs)=8V, Input Capacitance=1.61nF, Max Operating Temperature=150°C, Max Power Dissipation=810mW, Min Operating Temperature=-55°C, On-State Resistance=62mR, Package Quantity=3000, Contact Plating=Tin, Element Configuration=Single, Fall Time=42.4ns, Height=1.1mm, Lead Free="Lead Free", Length=3mm, Mount="Surface Mount", Number of Channels=1, Number of Elements=1, Number of Pins=3, Packaging="Tape and Reel", Power Dissipation=810mW, Radiation Hardening=No, Rds On Max=35mR, REACH SVHC="No SVHC", Rise Time=12.4ns, Turn-Off Delay Time=94.1ns, Turn-On Delay Time=16.8ns, Weight=0.000282oz, Width=1.4mm
R1 R4 R5 R8 R9_B1 R9_B2 R9_B3 R9_B4 R10_B1 R10_B2 R10_B3 R10_B4: library part CMP-2000-01852-1, Manufacturer="KOA Speer", Part Number=RK73B1JTTD104J
R2 R3 R6 R7: library part CMP-2000-00899-1, Manufacturer=Panasonic, Part Number=ERA3AEB1240V
R11_B1 R11_B2 R11_B3 R11_B4: library part CMP-2000-00629-1, Manufacturer=Panasonic, Part Number=ERJ-3EKF7152V
R12_B1 R12_B2 R12_B3 R12_B4: library part CMP-2000-00327-1, Manufacturer=Panasonic, Part Number=ERJ-3EKF2101V
R13_B1 R13_B2 R13_B3 R13_B4: library part CMP-2000-01851-2, "RES 10K OHM 5% 1/10W 0603", Case Code (Imperial)=0603, Case Code (Metric)=1608, Max Operating Temperature=155°C, Min Operating Temperature=-55°C, Package Quantity=5000, Power Rating=100mW, Resistance=10kR, Resistance Tolerance=5%, Resistor Type="Thick Film", Temperature Coefficient=200ppm/°C, Voltage Rating=50V, Case/Package=0603, Construction=Rectangular, Depth=0.8mm, Height=0.45mm, Lead Free="Lead Free", Length=1.6mm, Military Standard=Not, Number of Pins=2, Packaging="Tape and Reel", RoHS Compliant=Yes, Series=RK73B, Technology="THICK FILM", Termination=SMD/SMT, Tolerance=5%, Voltage Rating (DC)=50V, Width=0.8mm
R14_B1 R14_B2 R14_B3 R14_B4: library part CMP-2000-00802-1, Manufacturer=Panasonic, Part Number=ERJ-3GEYJ511V
R15_B1 R15_B2 R15_B3 R15_B4: library part CMP-05419-000002-1, "THERMISTOR NTC 10KOHM 3380K 0603", Case Code (Imperial)=0603, Case Code (Metric)=1608, Max Operating Temperature=125°C, Max Power Dissipation=100mW, Min Operating Temperature=-40°C, Package Quantity=4000, Resistance=10kR, Resistance Tolerance=5%, Accuracy=1%, Case/Package=0603, Depth=0.8mm, Lead Free="Lead Free", Length=1.6mm, Mount="Surface Mount", Number of Pins=2, Packaging="Tape and Reel", Radiation Hardening=No, REACH SVHC="No SVHC", RoHS Compliant=Yes, Series=ERT-J, Termination=SMD/SMT, Tolerance=5%, Width=800um
R16 R17: library part CMP-2000-00803-1, Manufacturer=Panasonic, Part Number=ERJ-3GEYJ512V
U1 U2: library part CMP-0479-00071-2, "IC OR CTRLR SRC SELECT 16DFN", Case/Package=DFN, Max Operating Temperature=125°C, Max Output Current=4A, Min Operating Temperature=-40°C, Operating Supply Current=44uA, Package Quantity=2500, Lead Free="Lead Free", Length=5mm, Number of Pins=16, Packaging="Tape and Reel", RoHS Compliant=Yes, Series=PowerPath™
U3_B1 U3_B2 U3_B3 U3_B4: library part CMP-0478-00063-1, "USB Power Manager with Ideal Diode Controller and 3.95 V Li-Ion Charger, 32.6% Vvntc, No Undervoltage Current Limit, 4.35 to 5.5 V Vin, 14-pin SON (DE-14), -40 to 85 degC, Pb-Free", Manufacturer="Linear Technology", Code_JEDEC=MO-229, ComponentLink1Description="Manufacturer URL", ComponentLink1URL=http://www.linear.com/, ComponentLink2Description=Datasheet, ComponentLink2URL=http://cds.linear.com/docs/en/datasheet/408534fb.pdf, ComponentLink3Description="Package Specification", ComponentLink3URL=http://www.linear.com/docs/en/packaging/DFN_14_05-08-1708.pdf, DatasheetVersion="Rev. B", Mounting Technology="Surface Mount", Number Of Cells=1, Number Of Outputs=1, PackageDescription="14-Pin Plastic DFN, Body 4 x 3 mm, Pitch 0.5 mm", PackageReference=DE-14, PackageVersion="Rev. B, 06/2010", PartNumber=LTC4085EDE-4#PBF, RoHS=TRUE, Vin Max(V)=5.5, Vin Min(V)=4.35

## Free pads (board coordinates)
  round 250 hole 125.2: 1(200,3350) 2(3575.2,3200) 3(3575.2,300) 4(200,200)

## Via types
v1: diameter 20, hole 10, Top Layer to Bottom Layer, 44 vias
v2: diameter 19.68, hole 7.87, Top Layer to Bottom Layer, 24 vias

## Nets (pads, with @x,y where several pads share a name; then routed paths per layer and width w, separated by ;. In a path a pad name is that pad's centre, name@x,y a point inside that pad or via, vN(x,y) a via of type N, cw(c..) or ccw(c..) an arc to the next point about the centre after c; other vN are vias at no path point)
BAT1: BT1+.1 BT1+.2 BT1+.3 Q1_B1.2 U3_B1.14 | length 1980.8
  Top Layer w10: v1(1398,665.43) v1(1398,850)
  Bottom Layer w10: U3_B1.14 1340.79,940.94 1398,883.73 v1(1398,850) ; 1398,550 v1(1398,665.43)
  Bottom Layer w30: BT1+.3 BT1+.2 ; BT1+.1 BT1+.2 ; Q1_B1.2 1663.98,685.01 1528.97,550 1398,550 BT1+.2
BAT2: BT2+.1 BT2+.2 BT2+.3 Q1_B2.2 U3_B2.14 | length 1980.8
  Top Layer w10: v1(1398,1413.94) v1(1398,1600)
  Bottom Layer w10: U3_B2.14 1340.79,1690.94 1398,1633.73 v1(1398,1600) ; 1398,1300 v1(1398,1413.94)
  Bottom Layer w30: BT2+.3 BT2+.2 ; BT2+.1 BT2+.2 ; Q1_B2.2 1663.98,1435.01 1528.97,1300 1398,1300 BT2+.2
BAT3: BT3+.1 BT3+.2 BT3+.3 Q1_B3.2 U3_B3.14 | length 1981
  Top Layer w10: v1(1398,2165) v1(1398,2350.43)
  Bottom Layer w10: U3_B3.14 1340.79,2440.94 1398,2383.73 v1(1398,2350.43) ; v1(1398,2165) 1398.5,2164.5 1398.5,2050
  Bottom Layer w30: BT3+.3 BT3+.2 ; BT3+.1 BT3+.2 ; Q1_B3.2 1663.98,2185.01 1528.97,2050 1398.5,2050 BT3+.2
BAT4: BT4+.1 BT4+.2 BT4+.3 Q1_B4.2 U3_B4.14 | length 1983.2
  Top Layer w10: v1(1398,3096.26) 1398.5,3095.76 1398.5,2915.5 v1(1399,2915)
  Bottom Layer w10: U3_B4.14 1340.79,3190.94 1340.87,3190.87 1340.87,3190.59 1400,3131.46 1400,3115 1399.91,3114.91 1399.91,3098.17 v1(1398,3096.26) ; v1(1399,2915) 1399,2801 1400,2800
  Bottom Layer w30: BT4+.3 BT4+.2 ; BT4+.1 BT4+.2 ; Q1_B4.2 1663.98,2935.01 1528.97,2800 1400,2800 BT4+.2
GND: BT1-.1 BT1-.2 BT1-.3 BT2-.1 BT2-.2 BT2-.3 BT3-.1 BT3-.2 BT3-.3 BT4-.1 BT4-.2 BT4-.3 C1.1 C2.1 C3_B1.2 C3_B2.2 C3_B3.2 C3_B4.2 C4_B1.2 C4_B2.2 C4_B3.2 C4_B4.2 C5_B1.2 C5_B2.2 C5_B3.2 C5_B4.2 C6_B1.2 C6_B2.2 C6_B3.2 C6_B4.2 J1.5 J1.6 J1.7 J1.8 J2.1 J2.2 J2.3 J2.4 J2.A12 J2.B12 R2.1 R3.1 R4.2 R6.1 R7.1 R8.2 R9_B1.2 R9_B2.2 R9_B3.2 R9_B4.2 R11_B1.1 R11_B2.1 R11_B3.1 R11_B4.1 R12_B1.1 R12_B2.1 R12_B3.1 R12_B4.1 R15_B1.2 R15_B2.2 R15_B3.2 R15_B4.2 R16.2 R17.2 U1.17 U2.17 U3_B1.15 U3_B2.15 U3_B3.15 U3_B4.15 | length 2264.9
  Top Layer w50: J1.7 J1.5 ; J1.8 J1.6
  Bottom Layer w30: BT1-.1 BT1-.2 BT1-.3 ; BT2-.1 BT2-.2 BT2-.3 ; BT3-.1 BT3-.2 BT3-.3 ; BT4-.1 BT4-.2 BT4-.3
  other v2: 1255.32,960.63 1294.69,960.63 1255.32,1000 1294.69,1000 1255.32,1039.37 1294.69,1039.37 1255.32,1710.63 1294.69,1710.63 1255.32,1750 1294.69,1750 1255.32,1789.37 1294.69,1789.37 1255.32,2460.63 1294.69,2460.63 1255.32,2500 1294.69,2500 1255.32,2539.37 1294.69,2539.37 1255.32,3210.63 1294.69,3210.63 1255.32,3250 1294.69,3250 1255.32,3289.37 1294.69,3289.37
ID_VOUT: C1.2 C2.2 J1.1 J1.2 J1.3 J1.4 U1.9-10 U1.15-16 U2.9-10 U2.15-16 | length 4296.2
  Top Layer w40: J1.4@1987.42,432.74 1992.6,437.92 1992.6,515.24 v1(2027.36,550) ; J1.3 1992.6,232.44 1992.6,306.57 2016.03,330 v1(2176,330) ; J1.1 v1(2176,227.44) ; J1.2 2092.6,437.56 2092.6,516.6 2126,550 v1(2176,550)
  Bottom Layer w25: C2.2 2356.98,2654.55 2356.98,2583.95
  Bottom Layer w30: C1.2@2331.58,1180.04 2359.84,1151.78 2359.84,1088.98 ; 2356.98,2583.95 2426.05,2583.95 2460,2550 ; 2361.96,966 2423,966 2459.5,929.5 ; 2364.87,2466.05 2423.95,2466.05 2460,2430 ; 2371.5,1084 2416.34,1084 2459,1041.34
  Bottom Layer w40: v1(2027.36,550) v1(2176,550) 2329,550 2331,552 ; v1(2176,227.44) 2282.44,227.44 2331,276 2331,330 ; v1(2176,330) 2331,330 ; 2460,2550 2460,2430 2460,681 2331,552 ; 2331,330 2331,552
NetC5_B1_1: C5_B1.1 U3_B1.6 | length 245.4
  Bottom Layer w10: C5_B1.1 1087.45,1102.36 1148.48,1041.34 1150.36,1041.34 1152.33,1039.37 U3_B1.6
NetC5_B2_1: C5_B2.1 U3_B2.6 | length 245.9
  Bottom Layer w10: C5_B2.1 1086.05,1853.68 1150.36,1789.37 U3_B2.6
NetC5_B3_1: C5_B3.1 U3_B3.6 | length 246.2
  Bottom Layer w10: C5_B3.1 1077.2,2604.33 1142.17,2539.37 U3_B3.6
NetC5_B4_1: C5_B4.1 U3_B4.6 | length 247
  Bottom Layer w10: C5_B4.1 1079.76,3356.3 1146.69,3289.37 U3_B4.6
NetD2_B1_1: D2_B1.1 U3_B1.11 | length 128.5
  Bottom Layer w10: U3_B1.11 1366.1,1000 1407.44,1041.34 D2_B1.1
NetD2_B1_2: D2_B1.2 R14_B1.1 | length 90
  Bottom Layer w10: D2_B1.2 R14_B1.1
NetD2_B2_1: D2_B2.1 U3_B2.11 | length 127.7
  Bottom Layer w10: U3_B2.11 1367.09,1750 1406.46,1789.37 D2_B2.1
NetD2_B2_2: D2_B2.2 R14_B2.1 | length 90
  Bottom Layer w10: D2_B2.2 R14_B2.1
NetD2_B3_1: D2_B3.1 U3_B3.11 | length 128.5
  Bottom Layer w10: U3_B3.11 1366.1,2500 1407.44,2541.34 D2_B3.1
NetD2_B3_2: D2_B3.2 R14_B3.1 | length 90
  Bottom Layer w10: D2_B3.2 R14_B3.1
NetD2_B4_1: D2_B4.1 U3_B4.11 | length 130
  Bottom Layer w10: U3_B4.11 1363,3250 1407.92,3294.92 D2_B4.1
NetD2_B4_2: D2_B4.2 R14_B4.1 | length 90
  Bottom Layer w10: D2_B4.2 R14_B4.1
NetJ2_A5: J2.A5 R16.1 | length 214.5
  Top Layer w10: v1(1129.68,360) 1129.68,264.76 1158.11,236.34 1158.11,233.39 1166.89,224.61 R16.1
  Bottom Layer w10: J2.A5 v1(1129.68,360)
NetJ2_B5: J2.B5 R17.1 | length 214.5
  Top Layer w10: R17.1 1053.11,224.61 1061.89,233.39 1061.89,236.34 1090.32,264.76 v1(1090.32,360)
  Bottom Layer w10: J2.B5 v1(1090.32,360)
NetQ1_B1_1: Q1_B1.1 U3_B1.13 | length 728.7
  Top Layer w10: v1(1448.43,850) 1448.43,725.35 ccw(c1548.43,725.35) 1548.43,625.35 1732.65,625.35 v1(1734,624)
  Bottom Layer w10: U3_B1.13 1348.43,960.63 cw(c1348.43,860.63) 1448.43,860.63 v1(1448.43,850) ; v1(1734,624) 1735.01,625.01 1735.01,698.99 Q1_B1.1
NetQ1_B2_1: Q1_B2.1 U3_B2.13 | length 756.7
  Top Layer w10: v1(1448.43,1600) 1448.43,1461 ccw(c1548.43,1461) 1548.43,1361 v1(1736.02,1361)
  Bottom Layer w10: U3_B2.13 1348.43,1710.63 cw(c1348.43,1610.63) 1448.43,1610.63 v1(1448.43,1600) ; v1(1736.02,1361) Q1_B2.1
NetQ1_B3_1: Q1_B3.1 U3_B3.13 | length 726.3
  Top Layer w10: v1(1448.43,2350) 1448.43,2226.7 ccw(c1548.43,2226.7) 1548.43,2126.7 1735.32,2126.7 v1(1736.02,2126)
  Bottom Layer w10: U3_B3.13 1348.43,2460.63 cw(c1348.43,2360.63) 1448.43,2360.63 v1(1448.43,2350) ; v1(1736.02,2126) Q1_B3.1
NetQ1_B4_1: Q1_B4.1 U3_B4.13 | length 740.1
  Top Layer w10: v1(1448.43,3096.26) 1448.43,2970 ccw(c1548.43,2970) 1548.43,2870 1735.02,2870 v1(1736.02,2869)
  Bottom Layer w10: U3_B4.13 1348.43,3210.63 cw(c1348.43,3110.63) 1448.43,3110.63 v1(1448.43,3096.26) ; v1(1736.02,2869) Q1_B4.1
NetR1_1: R1.1 U1.3 | length 291.5
  Bottom Layer w10: R1.1 2006.5,930 2071.97,995.47 U1.3
NetR2_2: R2.2 U1.4 | length 276.5
  Bottom Layer w10: R2.2 2013.49,995.47 2032.99,1014.97 2232.96,1014.97 2233.06,1015.08 2243.82,1015.08 U1.4
NetR3_2: R3.2 U1.5 | length 276.5
  Bottom Layer w10: R3.2 1977.56,1052.56 2016.14,1052.56 2033.86,1034.84 U1.5
NetR4_1: R4.1 U1.6 | length 291.5
  Bottom Layer w10: R4.1 2006.5,1120 2071.97,1054.53 U1.6
NetR5_1: R5.1 U2.3 | length 291.5
  Bottom Layer w10: R5.1 1980.21,2430.68 2014.06,2430.68 2078.86,2495.47 U2.3
NetR6_2: R6.2 U2.4 | length 276.5
  Bottom Layer w10: R6.2 2013.49,2495.47 2033.17,2515.16 U2.4
NetR7_2: R7.2 U2.5 | length 276.5
  Bottom Layer w10: R7.2 2012.51,2554.53 2032.2,2534.84 U2.5
NetR8_1: R8.1 U2.6 | length 291.5
  Bottom Layer w10: R8.1 2012.2,2620 2077.68,2554.53 U2.6
NetR9_B1_1: R9_B1.1 U3_B1.5 | length 221.5
  Bottom Layer w10: R9_B1.1 1107.89,1039.37 1127.39,1019.87 1205.99,1019.87 1206.09,1019.76 1217.83,1019.76 U3_B1.5
NetR9_B2_1: R9_B2.1 U3_B2.5 | length 221.5
  Bottom Layer w10: R9_B2.1 1109.7,1789.37 1129.2,1769.87 1205.99,1769.87 1206.09,1769.76 1217.83,1769.76 U3_B2.5
NetR9_B3_1: R9_B3.1 U3_B3.5 | length 221.5
  Bottom Layer w10: R9_B3.1 1103.39,2539.37 1123.07,2519.69 U3_B3.5
NetR9_B4_1: R9_B4.1 U3_B4.5 | length 221.5
  Bottom Layer w10: R9_B4.1 1108.29,3289.37 1127.79,3269.87 1205.99,3269.87 1206.09,3269.76 1217.83,3269.76 U3_B4.5
NetR10_B1_1: R10_B1.1 U3_B1.4 | length 221.5
  Bottom Layer w10: R10_B1.1 1109.7,980.31 1129.2,999.81 1205.99,999.81 1206.09,999.92 1217.83,999.92 U3_B1.4
NetR10_B2_1: R10_B2.1 U3_B2.4 | length 221.5
  Bottom Layer w10: R10_B2.1 1108.78,1730.31 1128.28,1749.81 1205.99,1749.81 1206.09,1749.92 1217.83,1749.92 U3_B2.4
NetR10_B3_1: R10_B3.1 U3_B3.4 | length 221.5
  Bottom Layer w10: R10_B3.1 1103.39,2480.31 1123.07,2500 U3_B3.4
NetR10_B4_1: R10_B4.1 U3_B4.4 | length 221.5
  Bottom Layer w10: R10_B4.1 1108.78,3230.31 1128.28,3249.81 1205.99,3249.81 1206.09,3249.92 1217.83,3249.92 U3_B4.4
NetR11_B1_2: R11_B1.2 U3_B1.12 | length 116.3
  Bottom Layer w10: U3_B1.12 R11_B1.2
NetR11_B2_2: R11_B2.2 U3_B2.12 | length 116.3
  Bottom Layer w10: U3_B2.12 R11_B2.2
NetR11_B3_2: R11_B3.2 U3_B3.12 | length 116.3
  Bottom Layer w10: U3_B3.12 R11_B3.2
NetR11_B4_2: R11_B4.2 U3_B4.12 | length 116.3
  Bottom Layer w10: U3_B4.12 R11_B4.2
NetR12_B1_2: R12_B1.2 U3_B1.3 | length 243.2
  Bottom Layer w10: R12_B1.2 1085.4,915.35 1150.36,980.31 U3_B1.3
NetR12_B2_2: R12_B2.2 U3_B2.3 | length 243.2
  Bottom Layer w10: R12_B2.2 1085.4,1665.35 1150.36,1730.31 U3_B2.3
NetR12_B3_2: R12_B3.2 U3_B3.3 | length 243.2
  Bottom Layer w10: R12_B3.2 1077.2,2415.35 1142.17,2480.31 U3_B3.3
NetR12_B4_2: R12_B4.2 U3_B4.3 | length 243.2
  Bottom Layer w10: R12_B4.2 1081.73,3165.35 1146.69,3230.31 U3_B4.3
NetR13_B1_1: R13_B1.1 R15_B1.1 U3_B1.8 | length 1386
  Top Layer w10: v1(1558.07,1102.36) 1678.97,1102.36 2106.68,674.65 R15_B1.1
  Bottom Layer w10: U3_B1.8 1348.29,1059.06 1417.91,1128.67 1480.19,1128.67 1504.53,1104.33 R13_B1.1 v1(1558.07,1102.36)
NetR13_B1_2: R13_B1.2 U3_B1.9 | length 139.5
  Bottom Layer w10: U3_B1.9 1332.17,1039.45 1357.72,1039.45 1420.63,1102.36 R13_B1.2
NetR13_B2_1: R13_B2.1 R15_B2.1 U3_B2.8 | length 1374.3
  Top Layer w10: v1(1558.07,1853.68) 1705.96,1853.68 2107,1452.65 R15_B2.1
  Bottom Layer w10: U3_B2.8 1340.79,1809.06 1411.73,1880 1480.19,1880 1506.5,1853.68 v1(1558.07,1853.68)
NetR13_B2_2: R13_B2.2 U3_B2.9 | length 140
  Bottom Layer w10: U3_B2.9 1332.17,1789.45 1356.39,1789.45 1420.63,1853.68 R13_B2.2
NetR13_B3_1: R13_B3.1 R15_B3.1 U3_B3.8 | length 1387
  Top Layer w10: v1(1549,2604.33) 1678.67,2604.33 2107,2176 R15_B3.1
  Bottom Layer w10: U3_B3.8 1349.06,2559.06 1420.64,2630.64 1480.19,2630.64 1504.53,2606.3 R13_B3.1 v1(1549,2604.33)
NetR13_B3_2: R13_B3.2 U3_B3.9 | length 140.3
  Bottom Layer w10: U3_B3.9 1332.17,2539.45 1359.45,2539.45 1424.33,2604.33 R13_B3.2
NetR13_B4_1: R13_B4.1 R15_B4.1 U3_B4.8 | length 1387
  Top Layer w10: v1(1558.07,3358.27) 1682.63,3358.27 2107,2933.9 R15_B4.1
  Bottom Layer w10: U3_B4.8 1348.5,3309.06 1424.03,3384.58 1480.19,3384.58 1504.53,3360.24 R13_B4.1 v1(1558.07,3358.27)
NetR13_B4_2: R13_B4.2 U3_B4.9 | length 141.9
  Bottom Layer w10: U3_B4.9 1332.17,3289.45 1356.47,3289.45 1425.29,3358.27 R13_B4.2
Vin_Sol: C4_B1.1 C4_B2.1 C4_B3.1 C4_B4.1 J1.9 J1.10 R10_B1.2 R10_B2.2 R10_B3.2 R10_B4.2 U3_B1.1 U3_B2.1 U3_B3.1 U3_B4.1 | length 5746.7
  Top Layer w10: v1(890,980) 939.68,980 940,980.31 ; v1(890,1730) 890.32,1730.31 940,1730.31 ; v1(890,2480) 890.32,2480.31 940,2480.31 ; v1(890,3230.31) 940,3230.31 ; 940,1600.43 940.43,1600
  Top Layer w20: 940,850 v1(1170,850) ; 940,2350.43 v1(1170,2350.43) ; 940,3100 v1(1170,3100) ; 940.43,1600 v1(1170,1600)
  Top Layer w30: 940,3230.31 940,3100 940,2480.31 940,2350.43 940,1730.31 940,1600.43 940,980.31 940,850 940,685 1192.44,432.56 J1.10 J1.9
  Bottom Layer w10: v1(890,980) 945.16,980 R10_B1.2 ; v1(890,1730) 945.16,1730 R10_B2.2 ; v1(890,2480) 945.16,2480 R10_B3.2 ; v1(890,3230.31) R10_B4.2 ; U3_B1.1 1189.68,940.94 1170,921.26 v1(1170,850) C4_B1.1 ; U3_B2.1 1190.12,1690.94 1170,1670.82 v1(1170,1600) C4_B2.1 ; U3_B3.1 1190.12,2440.94 1170,2420.82 v1(1170,2350.43) 1170.43,2350 C4_B3.1 ; U3_B4.1 1191.65,3190.94 1170,3169.29 v1(1170,3100) C4_B4.1
Vout_BC1: C6_B1.1 D1_B1.1 Q1_B1.3 R1.2 R14_B1.2 U1.1-2 U3_B1.2 | length 2005.6
  Bottom Layer w10: U3_B1.2 1163.28,960.63 1131.43,928.78 1131.43,826.53 1166.62,791.34 1290.35,791.34 1331.69,750 D1_B1.1 ; R14_B1.2 1653.54,1038.39 1700,991.93 Q1_B1.3 ; 1825,776.91 1825,830.59 1920.47,926.06 R1.2
  Bottom Layer w30: D1_B1.1 1515.77,750 1542.68,776.91 Q1_B1.3 1825,776.91 ; C6_B1.1 1825,776.91 ; 2235.21,965.97 2149.97,965.97 2102,918 2102,820.66 2058.25,776.91 1825,776.91
Vout_BC2: C6_B2.1 D1_B2.1 Q1_B2.3 R14_B2.2 U1.7-8 U3_B2.2 | length 2023.7
  Bottom Layer w10: U3_B2.2 1164.22,1710.63 1131.43,1677.83 1131.43,1576.53 1166.62,1541.34 1290.35,1541.34 1331.69,1500 D1_B2.1 ; R14_B2.2 1653.54,1786.42 1700,1739.96 Q1_B2.3
  Bottom Layer w30: D1_B2.1 1515.78,1500 1542.68,1526.91 Q1_B2.3 1825,1526.91 ; C6_B2.1 1825,1526.91 ; 2235.21,1084.03 2149.97,1084.03 2102,1132 2102,1413.94 1989.03,1526.91 1825,1526.91
Vout_BC3: C6_B3.1 D1_B3.1 Q1_B3.3 R5.2 R14_B3.2 U2.1-2 U3_B3.2 | length 1992.1
  Bottom Layer w10: U3_B3.2 1168.74,2460.63 1123.07,2414.96 1123.07,2337.04 1168.78,2291.34 1290.35,2291.34 1331.69,2250 D1_B3.1 ; R14_B3.2@1653.54,2539.37 1653.54,2536.42 1700,2489.96 Q1_B3.3 ; 1825,2276.91 1825,2330.59 1920.47,2426.06 R5.2
  Bottom Layer w30: D1_B3.1 1515.78,2250 1542.68,2276.91 Q1_B3.3 1825,2276.91 ; C6_B3.1 1825,2276.91 ; 2235.21,2465.97 2149.97,2465.97 2102,2418 2102,2344.5 2034.41,2276.91 1825,2276.91
Vout_BC4: C6_B4.1 D1_B4.1 Q1_B4.3 R14_B4.2 U2.7-8 U3_B4.2 | length 2053.9
  Bottom Layer w10: U3_B4.2 1167.65,3210.63 1132.42,3175.4 1132.42,3074.58 1165.66,3041.34 1290.35,3041.34 D1_B4.1@1331.69,3000 ; R14_B4.2 1700,3248.46 Q1_B4.3
  Bottom Layer w30: D1_B4.1 1515.78,3000 1542.68,3026.91 Q1_B4.3 1825,3026.91 ; C6_B4.1 1825,3026.91 ; 2235.21,2584.03 2149.97,2584.03 2102,2632 2102,2964 2039.09,3026.91 1825,3026.91
VUSB: C3_B1.1 C3_B2.1 C3_B3.1 C3_B4.1 D1_B1.2 D1_B2.2 D1_B3.2 D1_B4.2 J2.A9 J2.B9 U3_B1.7 U3_B2.7 U3_B3.7 U3_B4.7 | length 6981.7
  Top Layer w10: 840,1154 v1(890,1154) ; 840,1920 v1(890,1920) v1@890.32,1920 ; 840,2675 v1(890,2675) ; 840,3398.09 v1(890,3398.09)
  Top Layer w20: 840,750 v1(890,750) ; 840,1500 v1(890,1500) ; 840,2250 v1(890,2250) ; 840,3000 v1(890,3000)
  Top Layer w30: 840,3398.09 840,3000 840,2675 840,2250 840,1920 840,1500 840,1154 840,750 840,628 v1(1050.16,417.84) v1(1146.22,417.84)
  Bottom Layer w10: v1(890,1154) 1114.27,1154 U3_B1.7@1209.13,1059.13 ; v1(890,1920) 1098.27,1920 1209.21,1809.06 U3_B2.7 ; v1(890,2675) 1034.11,2675 1150.06,2559.06 U3_B3.7 ; v1(890,3398.09) 1120.18,3398.09 1209.21,3309.06 U3_B4.7
  Bottom Layer w20: v1(890,750) D1_B1.2 1215.94,688.62 1239.57,665 C3_B1.1 ; v1(890,1500) D1_B2.2 1215.94,1438.62 1239.57,1415 C3_B2.1 ; v1(890,2250) D1_B3.2 1215.94,2188.62 1239.57,2165 C3_B3.1 ; v1(890,3000) D1_B4.2 1215.94,2938.62 1239.57,2915 C3_B4.1
  Bottom Layer w30: J2.A9 v1(1050.16,417.84) ; v1@1147.16,417.84 1169.84,395.16 J2.B9
pads on no net: H1.1 H1.2 H1.3 H1.4 H1.5 H1.6 H1.7 H1.8 H1.9 H1.10 H1.11 H1.12 H1.13 H1.14 H1.15 H1.16 H1.17 H1.18 H1.19 H1.20 H1.21 H1.22 H1.23 H1.24 H1.25 H1.26 H1.27 H1.28 H1.29 H1.30 H1.31 H1.32 H1.33 H1.34 H1.35 H1.36 H1.37 H1.38 H1.39 H1.40 H1.41 H1.42 H1.43 H1.44 H1.45 H1.46 H1.47 H1.48 H1.49 H1.50 H1.51 H1.52 H2.1 H2.2 H2.3 H2.4 H2.5 H2.6 H2.7 H2.8 H2.9 H2.10 H2.11 H2.12 H2.13 H2.14 H2.15 H2.16 H2.17 H2.18 H2.19 H2.20 H2.21 H2.22 H2.23 H2.24 H2.25 H2.26 H2.27 H2.28 H2.29 H2.30 H2.31 H2.32 H2.33 H2.34 H2.35 H2.36 H2.37 H2.38 H2.39 H2.40 H2.41 H2.42 H2.43 H2.44 H2.45 H2.46 H2.47 H2.48 H2.49 H2.50 H2.51 H2.52 U1.11 U1.12 U1.13 U1.14 U2.11 U2.12 U2.13 U2.14 U3_B1.10 U3_B2.10 U3_B3.10 U3_B4.10
copper on no net: | length 15165.3
  Top Layer w10: 0,47.24 ccw(c47.24,47.24) 47.24,0 1441.34,0 ccw(c1441.34,47.24) 1488.58,47.24 1488.58,67.72 cw(c1535.83,67.72) 1535.83,114.96 2239.37,114.96 cw(c2239.37,67.72) 2286.61,67.72 2286.61,47.24 ccw(c2333.86,47.24) 2333.86,0 3727.95,0 ccw(c3727.95,47.24) 3775.2,47.24 3775.2,1282.68 ccw(c3727.95,1282.68) 3727.95,1329.92 3727.56,1329.92 3707.09,1329.92 cw(c3707.09,1377.17) 3659.84,1377.17 3659.84,2082.68 cw(c3707.09,2082.68) 3707.09,2129.92 3707.29,2129.92 3727.95,2129.92 ccw(c3727.95,2177.17) 3775.2,2177.17 3775.2,3502.76 ccw(c3727.95,3502.76) 3727.95,3550 2333.86,3550 ccw(c2333.86,3502.76) 2286.61,3502.76 2286.61,3482.28 cw(c2239.37,3482.28) 2239.37,3435.04 1535.83,3435.04 cw(c1535.83,3482.28) 1488.58,3482.28 1488.58,3502.76 ccw(c1441.34,3502.76) 1441.34,3550 47.24,3550 ccw(c47.24,3502.76) 0,3502.76 0,2177.17 ccw(c47.24,2177.17) 47.24,2129.92 67.72,2129.92 cw(c67.72,2082.68) 114.96,2082.68 114.96,1377.17 cw(c67.72,1377.17) 67.72,1329.92 47.24,1329.92 ccw(c47.24,1282.68) 0,1282.68 0,47.24